# Altium PCB ESB32 with USBC PCB V1-1.PcbDoc (part 3 of 3)
Units mil, origin at the board's own origin, x right, y up, seen from the top; angles counter-clockwise.
Board outline 2700 x 1000 mil, 4 copper layers (L1, L2, L3, L4), stack 61.583 mil thick; 64 components, 73 nets, 299 pads, 161 vias.
Unrouted connection lines stored in the file: 13.
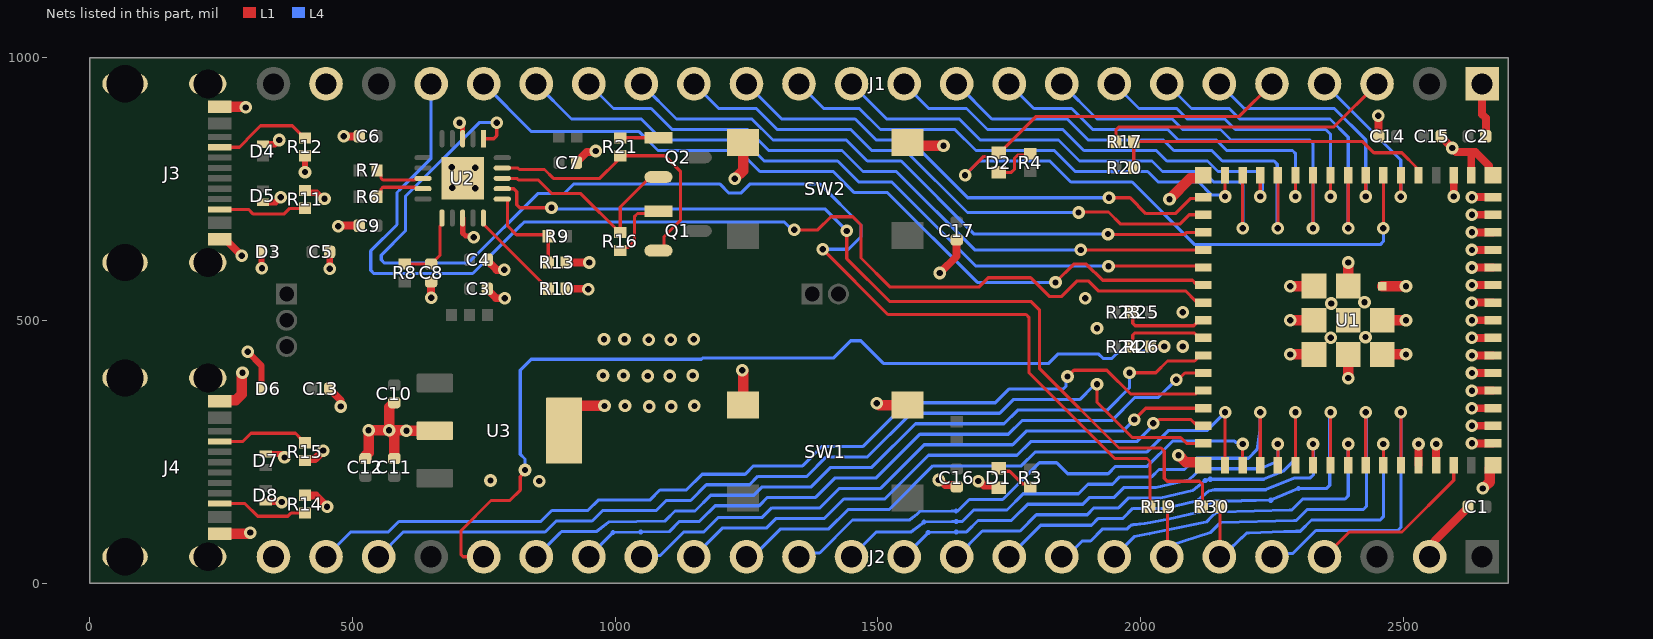
[diagram p4: the nets of this part, all layers, seen from the top]

## Via types
v1: diameter 24, hole 12, L1 to L4, tented both sides, 161 vias

## Nets (pads, with @x,y where several pads share a name; then routed paths per layer and width w, separated by ;. In a path a pad name is that pad's centre, name@x,y a point inside that pad or via, vN(x,y) a via of type N, cw(c..) or ccw(c..) an arc to the next point about the centre after c; other vN are vias at no path point) (continued)
CON_ESP_USB_P: J2.20 R26.1 | length 1785.3
  L1 w6.03: J2.20@750,50 710.55,50 707.01,53.53 707.01,100.01 764,157 799.72,157 819.58,176.85 819.58,202.48 828.56,211.47 v1(828.56,215) ; R26.1@2019.02,450 v1(2045.03,450)
  L4 w6.03: v1@828.53,215.03 828.53,236.05 819.58,245 819.58,405 840.53,425.95 1164.34,425.95 1166.4,428.01 1415.47,428.01 1448.47,461.01 1467.53,461.01 1510.58,417.97 1825.14,417.97 1843.18,436.01 1919.82,436.01 1928.69,427.14 1945.31,427.14 1961.18,443.01 1996.82,443.01 1998.36,441.47 2023.8,441.47 2029.83,447.5 2042.53,447.5 v1(2045.03,450)
CON_GPIO0: J1.3 R17.1 | length 555.5
  L1 w6: R17.1@1952.99,840 1952.99,862.14 1958.85,868 2368,868 J1.3@2450,950
DTR_FTDI: Q2.2 R16.1 U2.18 | length 412
  L1 w6: U2.18@785.41,770 813,770 816.13,766.87 854.14,766.87 880,741 934.82,741 R16.1@1008.82,667.01 ; R16.1@1010,667.01 1010,715.47 1067.12,772.6 Q2.2@1082.58,772.6
  L1 w10.01: R16.1@1008.82,667.01 R16.1@1010,667.01
ESP_USB_N: R23.2 R25.2 U1.23 | length 161.5
  L1 w6.03: R25.2@1984.97,515 1985,494.23 1989.71,489.51 2101.09,489.51 2111.57,500 U1.23@2119.45,500
ESP_USB_P: R24.2 R26.2 U1.24 | length 161.6
  L1 w6.03: R26.2@1985,450 1985,471.95 1988.53,475.49 2102.63,475.49 2111.57,466.54 U1.24@2119.45,466.54
FTDI_RESET: C8.1 R8.2 U2.11 | length 146.7
  L1 w6: R8.2@600,607.01 R8.2@600,607.01 649.96,606.97 C8.1@650,606.93 650.84,606.93 656.42,612.51 656.42,613.35 666.77,623.69 666.77,650 666.77,679.42 670.63,683.28 U2.11@670.63,694.59
FTDI_USB_N: R6.2 U2.9 | length 100.3
  L1 w6.03: R6.2@547.01,735 554.62,742.61 554.62,749.45 558.16,752.99 593.32,752.99 593.48,753.14 619.05,753.14 621.88,750.32 U2.9@634.59,750.32
FTDI_USB_P: R7.2 U2.8 | length 100.3
  L1 w6.03: R7.2@547.01,785 554.62,777.39 554.62,770.55 558.16,767.01 587.51,767.01 587.67,767.17 619.05,767.17 621.88,770 U2.8@634.59,770
GND: C1.2 C2.2 C3.2 C4.1 C5.2 C6.2 C7.2 C8.2 C9.2 C10.1 C11.2 C12.2 C13.2 C14.2 C15.2 C16.1 C17.2 D1.1 D3.1 D4.1 D5.1 D6.1 D7.1 D8.1 J1.1 J1.23 J2.2 J2.24 J3.A1B12 J3.B1A12 J3.S1 J3.S2 J3.S3 J3.S4 J4.A1B12 J4.B1A12 J4.S1 J4.S2 J4.S3 J4.S4 R10.2 R11.1 R12.1 R13.2 R14.1 R15.1 SW1.3 SW1.4 SW2.3 SW2.4 U1.1 U1.2 U1.42 U1.43 U1.46 U1.47 U1.48 U1.49 U1.50 U1.51 U1.52 U1.53 U1.54 U1.55 U1.56 U1.57 U1.58 U1.59 U1.60 U1.61 U1.62 U1.63 U1.64 U1.65 U1.66 U1.67 U1.68 U1.69 U1.70 U1.71 U1.72 U1.73 U2.3 U2.13 U2.21 U3.2 U3.4 | length 3722.3
  L1 w10.01: v1(704,876) 709.77,870.23 709.77,845.65 U2.3@710,845.41 ; U2.13@710,694.59 710,666.16 715.86,660.3 728.7,660.3 v1(731,658)
  L1 w12: v1(301,440) 327.2,413.8 D6.1@327.2,370 ; v1@327.2,599.8 D3.1@327.2,630 ; D5.1@330,724.41 354.41,724.41 v1(364,734) ; D4.1@330,834.8 352.8,834.8 v1(361,843) ; D8.1@335,154.41 365.59,154.41 v1(366,154) ; D7.1@335,245.59 364.41,245.59 v1(371,239) ; R11.1@410,747.01 414.63,742.38 432.37,742.38 443.75,731 v1(447,731) ; v1(410,782) R12.1@410,812.99 ; C5.2@456.93,630 456.93,598.07 v1(457,598)
  L1 w15: J3.B1A12@247.64,653.94 258.46,653.94 v1(289.4,623) v1@291,623 ; v1@327.2,599.8 v1(328,599) ; R15.1@410,232.99 413.13,236.12 429.12,236.12 v1(445,252) ; R14.1@410.63,166.38 430.62,166.38 v1(452,145) ; C13.2@456.93,370 456.93,368.82 478,347.75 v1(478,336) ; v1(473,679) 474,680 C9.2@513.07,680 ; v1@483,849 v1(484,850) C6.2@513.07,850 ; v1(650,543) C8.2@650,573.07 ; C3.2@756.93,560 756.93,558.82 773.75,542 v1(790,542) ; C4.1@756.93,615 756.93,613.82 774.75,596 v1(789,596) ; R10.2@907.01,560 948,560 v1(949,559) ; R13.2@907.01,610 v1(951,610) v1@952,611 ; C7.2@926.93,800 926.93,801.18 946.03,820.28 961.28,820.28 v1(963,822) ; SW2.3@1556.5,838.58 SW2.3@1563.08,832 ; v1(1616,196) 1618.44,196 1628.23,186.2 1646.87,186.2 C16.1@1650,183.07 ; v1(1618,590) 1650,622 C17.2@1650,653.07 ; v1(1691,194) 1693.44,194 1701.83,185.61 1725.69,185.61 D1.1@1730,181.3 ; v1(2452.54,889) 2452.54,850.54 C14.2@2453.07,850 ; U1.42@2528.9,224.41 v1(2528.9,264.57) ; J2.2@2550,50 2559.38,59.38 2559.38,80.12 2623.07,143.82 C1.2@2623.07,145 ; U1.43@2562.36,224.41 v1(2562.36,264.57) ; C15.2@2571.93,850 2571.93,848.82 v1(2593,827.75) 2593,827 2600,820 2637,820 ; v1(2595.83,735.43) U1.2@2595.83,775.59 ; U1.1@2629.29,775.59 2629.29,812.29 2637,820 ; v1(2630.47,265.75) U1.46@2670.63,265.75 ; v1(2630.47,299.21) U1.47@2670.63,299.21 ; v1(2630.47,332.68) U1.48@2670.63,332.68 ; v1(2630.47,366.14) U1.49@2670.63,366.14 ; v1(2630.47,399.61) U1.50@2670.63,399.61 ; v1(2630.47,433.07) U1.51@2670.63,433.07 ; v1(2630.47,466.54) U1.52@2670.63,466.54 ; v1(2630.47,500) U1.53@2670.63,500 ; v1(2630.47,533.46) U1.54@2670.63,533.46 ; v1(2630.47,566.93) U1.55@2670.63,566.93 ; v1(2630.47,600.39) U1.56@2670.63,600.39 ; v1(2630.47,633.86) U1.57@2670.63,633.86 ; v1(2630.47,667.32) U1.58@2670.63,667.32 ; v1(2630.47,700.79) U1.59@2670.63,700.79 ; v1(2630.47,734.25) U1.60@2670.63,734.25 ; J1.1@2650,950 2650,891.81 2656.93,884.88 C2.2@2656.93,850 ; U1.62@2670.63,775.59 2663,783.22 2663,794 2637,820
  L1 w20: J4.B1A12@247.64,94.09 304.09,94.09 v1(306,96) ; J4.A1B12@247.64,346.06 249.45,347.87 278.28,347.87 290,359.59 290,399 v1(291,400) ; J3.A1B12@247.64,905.91 296.09,905.91 v1(297,905) ; R14.1@410,167.01 R14.1@410.63,166.38 ; C12.2@525,236.93 526.18,236.93 526.81,237.56 526.81,243.74 531,247.93 v1@531,289.92 ; v1(531,291) v1(570,291) ; C11.2@580,236.93 580,279.92 570,289.92 v1(570,291) ; C10.1@580,343.07 578.82,343.07 570,334.25 v1(570,291) ; U3.2@656.97,290 v1(603,290) 602.5,290.5 570.5,290.5 v1(570,291) ; U3.4@903.03,290 903.03,312.55 927.48,337 v1(980,337) ; v1(1228,769) 1243.5,784.5 SW2.4@1243.5,838.58 ; v1(1242,405) 1243.5,403.5 SW1.4@1243.5,338.58 ; v1(1498,342) 1499.08,342 1502.5,338.58 SW1.3@1556.5,338.58 ; SW2.3@1563.08,832 v1(1625,832) ; v1(2055,730) 2094.84,769.84 2113.7,769.84 U1.63@2119.45,775.59 ; v1(2072,243) 2073.08,243 2085.92,230.16 2113.7,230.16 U1.64@2119.45,224.41 ; v1(2285,565) 2330.04,565 U1.71@2330.08,564.96 ; v1(2285.04,435.04) U1.73@2330.08,435.04 ; v1(2285.04,500) U1.72@2330.08,500 ; v1(2395.04,390) U1.70@2395.04,435.04 ; U1.69@2395.04,564.96 v1(2395.04,610) ; U1.68@2460,435.04 v1(2505.04,435.04) ; U1.67@2460,500 v1(2505.04,500) ; U1.66@2460,564.96 v1(2505.04,564.96) ; v1(2651,180) 2654,183 2655,183 2664.88,192.88 2664.88,218.66 U1.65@2670.63,224.41
  other v1: 856,194 763,195 1065,336 1107,336 1019,337 1151,337 1062,394 1104,394 977,395 1016,395 1148,395 2080,450 1064,463 1106,463 979,464 1018,464 1150,464 2362,467 2428,468 1917,485 2080,515 2363,532 2426,534 1895,542 734,751 690,752 734,790 689,791
GPIO0: R17.2 R20.2 U1.4 | length 625.2
  L1 w6: R20.2@1987.01,790 R17.2@1987.01,840 2422.72,840 2443.94,818.78 2497.08,818.78 2526.02,789.84 2526.02,778.46 U1.4@2528.9,775.59
GPIO1: J1.4 U1.5 | length 315.8
  L1 w6: v1(2495,735) 2495,775.16 U1.5@2495.43,775.59
  L4 w6: J1.4@2350,950 2495,805 v1(2495,735)
GPIO2: D2.1 J1.5 U1.6 | length 1657.2
  L1 w6: v1(1666,776) 1701.89,811.89 1723.19,811.89 D2.1@1730,818.7 1731.97,818.7 1801.27,888 2188,888 J1.5@2250,950 ; v1(2461.97,675.04) U1.6@2461.97,775.59
  L4 w6: v1(1666,776) 1693,803 1827.29,803 1867.29,763 1983.82,763 2102.82,644 2456.11,644 2461.97,649.86 v1(2461.97,675.04)
GPIO3: J1.6 U1.7 | length 470.7
  L1 w6: v1(2428.5,735.43) U1.7@2428.5,775.59
  L4 w6: J1.6@2150,950 2197,903 2368.72,903 2428.5,843.21 v1(2428.5,735.43)
GPIO4: J1.7 U1.8 | length 661
  L1 w6: v1(2395.04,675.04) U1.8@2395.04,775.59
  L4 w6: J1.7@2050,950 2097,903 2168.72,903 2188.72,883 2360.43,883 2395.04,848.39 v1(2395.04,675.04)
GPIO5: J1.8 U1.9 | length 609.8
  L1 w6: v1(2361.57,735.43) U1.9@2361.57,775.59
  L4 w6: J1.8@1950,950 1997,903 2068.72,903 2088.72,883 2160.43,883 2180.43,863 2352.15,863 2361.57,853.57 v1(2361.57,735.43)
GPIO6: J1.9 U1.10 | length 787.5
  L1 w6: v1(2328.11,675.04) U1.10@2328.11,775.59
  L4 w6: J1.9@1850,950 1917,883 2060,883 2080,863 2152.15,863 2172.15,843 2322.25,843 2328.11,837.14 v1(2328.11,675.04)
GPIO7: J1.10 U1.11 | length 722
  L1 w6: v1(2294.65,735.43) U1.11@2294.65,775.59
  L4 w6: J1.10@1750,950 1797,903 1868.72,903 1908.72,863 2051.72,863 2071.72,843 2143.86,843 2163.86,823 2289.14,823 2295,817.14 2295,735.79 v1(2294.65,735.43)
GPIO8: J1.11 U1.12 | length 896.5
  L1 w6: v1(2261.18,675.04) U1.12@2261.18,775.59
  L4 w6: J1.11@1650,950 1717,883 1860.43,883 1900.43,843 2043.43,843 2063.43,823 2135.58,823 2155.58,803 2254.14,803 2260,797.14 2260,676.22 v1(2261.18,675.04)
GPIO9: J1.12 U1.13 | length 837.2
  L1 w6: v1(2227.72,735.43) U1.13@2227.72,775.59
  L4 w6: J1.12@1550,950 1597,903 1668.72,903 1708.72,863 1852.15,863 1892.15,823 2030,823 2050,803 2127.29,803 2147.29,783 2226.14,783 2232,777.14 2232,748.29 2230.4,746.69 2230.4,738.11 v1(2227.72,735.43)
GPIO10: J1.13 U1.14 | length 1007.8
  L1 w6: v1(2194.25,675.04) U1.14@2194.25,775.59
  L4 w6: J1.13@1450,950 1517,883 1655,883 1695,843 1843.86,843 1883.86,803 2021.72,803 2041.72,783 2119.01,783 2139.01,763 2189.14,763 2195,757.14 2195,675.79 v1(2194.25,675.04)
GPIO11: J1.14 U1.15 | length 939.8
  L1 w6: v1(2160.79,735.43) U1.15@2160.79,775.59
  L4 w6: J1.14@1350,950 1397,903 1465,903 1505,863 1646.72,863 1686.72,823 1835.58,823 1875.58,783 2013.43,783 2033.43,763 2110.73,763 2135.61,738.11 2158.11,738.11 v1(2160.79,735.43)
GPIO12: J1.15 U1.16 | length 986.1
  L1 w6: v1(1940,733) 1980,733 2010,703 2066.18,703 2094.56,731.38 2116.57,731.38 U1.16@2119.45,734.25
  L4 w6: J1.15@1250,950 1317,883 1456.72,883 1496.72,843 1563.14,843 1569,837.14 1569,834.82 1670.82,733 v1(1940,733)
GPIO13: J1.16 U1.17 | length 1088.2
  L1 w6: v1(1882,705) 1883,706 1939,706 1962,683 2074.47,683 2092.26,700.79 U1.17@2119.45,700.79
  L4 w6: J1.16@1150,950 1197,903 1268.72,903 1308.72,863 1448.43,863 1488.43,823 1552.53,823 1670.53,705 v1(1882,705)
GPIO14: J1.17 U1.18 | length 1190.1
  L1 w6: v1(1938,664) 1939,663 2082.75,663 2087.07,667.32 U1.18@2119.45,667.32
  L4 w6: J1.17@1050,950 1117,883 1260.43,883 1300.43,843 1440.15,843 1480.15,803 1544.25,803 1683.25,664 v1(1938,664)
GPIO15: J1.18 U1.19 | length 1300.4
  L1 w6: v1(1885.86,633.86) U1.19@2119.45,633.86
  L4 w6: J1.18@950,950 997,903 1068.72,903 1108.72,863 1252.15,863 1292.15,823 1431.86,823 1471.86,783 1535,783 1684.14,633.86 v1(1885.86,633.86)
GPIO16: J1.19 U1.20 | length 1414.3
  L1 w6: v1(1939,603) 2116.84,603 U1.20@2119.45,600.39
  L4 w6: J1.19@850,950 917,883 1050,883 1090,843 1243.86,843 1283.86,803 1423.58,803 1463.58,763 1526.72,763 1686.72,603 v1(1939,603)
GPIO17: J1.20 U1.21 | length 1557
  L1 w6: v1(1838,572) 1872.86,606.86 1896.96,606.86 1927.82,576 2098.84,576 2105.04,569.8 2116.57,569.8 U1.21@2119.45,566.93
  L4 w6: J1.20@750,950 841,859 1045.72,859 1081.72,823 1235.58,823 1275.58,783 1415.29,783 1455.29,743 1518.43,743 1689.43,572 v1(1838,572)
GPIO18: J1.21 U1.22 | length 2191
  L1 w6: v1(1341,672) 1385.99,672 1410.99,697 1452.18,697 1468,681.18 1468,618.57 1523.57,563 1692,563 1710,581 1790.82,581 1826.82,545 1849.18,545 1879.18,575 1900.53,575 1919.53,556 2085.54,556 2105.2,536.34 2116.57,536.34 U1.22@2119.45,533.46
  L4 w6: J1.21@650,950 650,808.19 592,750.19 585,743.19 585,682.11 535,632.11 535,594.86 540.86,589 729,589 790,650 818,678 827,687 1322.21,687 1337.21,672 v1(1341,672)
GPIO21: J2.19 U1.25 | length 1444
  L1 w6: v1(1979,400) 2028.82,400 2051.3,422.48 2102.84,422.48 2108.7,428.34 2108.7,430.2 2111.57,433.07 U1.25@2119.45,433.07
  L4 w6: J2.19@850,50 895.07,95.07 898,98 964.52,98 987.72,116 1094.75,117.78 1097.6,120.64 1113.96,137 1152.15,137 1182.15,167 1264,167 1280,183 1373.43,183 1410.43,220 1488.68,220 1571.68,303 1740.01,303 1766.01,329 1936.72,329 1979,371.28 v1(1979,400)
GPIO26: J2.18 U1.26 | length 1313.5
  L1 w6: v1(2068,387) 2071.79,387 2084.39,399.61 U1.26@2119.45,399.61
  L4 w6: J2.18@950,50 993.07,93.07 996,96 ; 996.03,96 1049,96.99 ; 1049.19,96.99 1103.17,97.93 1122.25,117 1160.43,117 1163.36,119.93 1190.43,147 1274.15,147 1290.15,163 1381.72,163 1418.72,200 1496.96,200 1579.96,283 1748.29,283 1774.29,309 1945,309 1988.96,352.96 2033.96,352.96 v1(2068,387)
  L4 w10: 1049,96.99 cw(c1050,50) 1049.19,96.99
GPIO33: J2.17 U1.28 | length 1186.5
  L1 w6: v1(1988,311) 2009.68,332.68 U1.28@2119.45,332.68
  L4 w6: J2.17@1050,50 1052.47,52.47 1086,52.47 1130.53,97 1168.72,97 1196.72,125 1280.43,125 1298.43,143 1390,143 1427,180 1505.25,180 1588.25,263 1756.58,263 1782.58,289 1966,289 v1(1988,311)
GPIO34: J2.16 U1.29 | length 1084.7
  L1 w6: v1(2024,304) 2027.79,304 2034.79,311 2095.84,311 2104.76,302.09 2116.57,302.09 U1.29@2119.45,299.21
  L4 w6: J2.16@1150,50 1205,105 1288.72,105 1306.72,123 1398.43,123 1435.43,160 1513.53,160 1596.53,243 1764.86,243 1790.86,269 1992.79,269 2024,300.21 v1(2024,304)
GPIO35: J2.15 U1.31 | length 1125.2
  L1 w6: U1.31@2160.79,224.41 v1(2160.79,324.96)
  L4 w6: J2.15@1250,50 1262,50 1315,103 1406.72,103 1443.72,140 1521.82,140 1604.82,223 1773.15,223 1799.15,249 2011.53,249 2052.53,290 2125.83,290 v1(2160.79,324.96)
GPIO36: J2.14 U1.32 | length 994
  L1 w6: U1.32@2194.25,224.41 v1(2194.25,264.57)
  L4 w6: J2.14@1350,50 1357.23,57.23 1389.23,57.23 1449.07,117.07 1452,120 1560.23,120 1574.47,131.04 1579.43,136 1640.6,136.87 1648.63,136.99 ; 1648.8,136.99 1652.19,137.04 1674.15,159 1737.43,159 1807.43,229 1840.18,229 1861.18,208 1938.29,208 1952.29,222 2012.82,222 2060.82,270 2108.9,270 2178.92,270 2181.67,267.25 2191.57,267.25 v1(2194.25,264.57)
  L4 w10: 1648.63,136.99 cw(c1650,50) 1648.8,136.99
GPIO37: J2.13 U1.33 | length 1026
  L1 w6: U1.33@2227.72,224.41 v1(2227.72,324.96)
  L4 w6: J2.13@1450,50 1494.21,94.21 1497.14,97.14 1563.38,97.14 1587.72,116 ; 1587.75,116 1640.9,116.87 1648.95,116.99 ; 1649.01,116.99 1660.6,117.16 1682.43,139 1745.72,139 1776.72,170 1881.86,170 1899.86,188 1946.58,188 1960.58,202 2021.1,202 2035.1,216 2079.73,216 2083.64,216 2106.52,237.57 2205.44,237.57 2221.25,253.38 2227.72,291.08 v1(2227.72,324.96)
  L4 w10: 1648.95,116.99 cw(c1650,50) 1649.01,116.99
GPIO38: J2.12 U1.34 | length 849.8
  L1 w6: U1.34@2261.18,224.41 v1(2261.18,264.57)
  L4 w6: J2.12@1550,50 1593.07,93.07 1596,96 ; 1596.03,96 1649,96.99 ; 1649.3,96.99 1669,97.29 1690.72,119 1754,119 1756.93,121.93 1785,150 1890.15,150 1903.15,163 1949.86,163 1968.86,182 2029.38,182 2091.47,196 2114.8,217.57 2118.49,217.57 2228.32,217.57 2255.32,229.2 2261.18,235.06 v1(2261.18,264.57)
  L4 w10: 1649,96.99 cw(c1650,50) 1649.3,96.99
GPIO39: J2.11 U1.35 | length 902
  L1 w6: U1.35@2294.65,224.41 v1(2294.65,324.96)
  L4 w6: J2.11@1650,50 1699,99 1770.72,99 1801.72,130 1898.43,130 1911.43,143 1958.15,143 1977.15,162 2037.67,162 2098.75,175.77 2110.53,185.33 2118.6,192.03 2122.88,195.25 2132.64,197.56 2234.33,197.57 2272.49,213.49 2294.65,235.65 v1(2294.65,324.96)
GPIO40: J2.10 U1.36 | length 732
  L1 w6: U1.36@2328.11,224.41 v1(2328.11,264.57)
  L4 w6: J2.10@1750,50 1810,110 1906.72,110 1919.72,123 1966.43,123 1985.43,142 2045.95,142 2105.84,155.77 2108.79,157.54 2130.1,175.25 2140.95,177.57 2237.47,177.57 2238.4,177.6 2292.09,200 2323.14,200 2329,205.86 2329,263.68 v1(2328.11,264.57)
GPIO41: J2.9 U1.37 | length 792.2
  L1 w6: U1.37@2361.57,224.41 v1(2361.57,324.96)
  L4 w6: J2.9@1850,50 1858.86,50 1888.86,80 1905,80 1928,103 1974.72,103 1979.67,107.96 1982.19,110.48 1985.74,110.84 2007.95,113.08 2054.24,122 2116.32,136 2121.56,141.24 2137.14,154.24 2138.57,155.43 2139.05,155.6 2192.21,156.67 2247.67,157.74 ; 2247.71,157.76 2300.36,179.99 ; 2300.4,180 2336.37,180 2354.14,180 2360,185.86 2360,323.39 v1(2361.57,324.96)
GPIO42: J2.8 U1.38 | length 621
  L1 w6: U1.38@2395.04,224.41 v1(2395.04,264.57)
  L4 w6: J2.8@1950,50 1988.78,88.78 2017.05,93.9 2064.04,103.52 2124.61,116 2135.07,126.46 2143.49,133.49 2147.18,134.61 2148.52,134.86 2283.6,138.78 2287.57,138.89 2290.38,141.7 2308.68,160 2389.18,160 2395.04,165.86 v1(2395.04,264.57)
GPIO45: J2.5 U1.41 | length 588.2
  L1 w6: U1.41@2495.43,224.41 v1(2495.43,324.96)
  L4 w6: J2.5@2250,50 2256.47,56.47 2290,56.47 2333.53,100 2489.58,100 2495.43,105.86 v1(2495.43,324.96)
GPIO46: J2.4 U1.44 | length 335
  L1 w6: J2.4@2350,50 2397,97 2497.38,97 2595.83,195.44 U1.44@2595.83,224.41
GPIO47: J2.23 U1.27 | length 1846.7
  L1 w6: v1(1861,393) 1873,405 1935.82,405 1980.82,360 2105.43,360 2111.57,366.14 U1.27@2119.45,366.14
  L4 w6: J2.23@450,50 497,97 568.72,97 588.72,117 858.72,117 879.72,138 947.96,138 967.74,157.78 1066,157.78 1085.22,177 1135.58,177 1165.58,207 1247.43,207 1263.43,223 1356.86,223 1393.86,260 1472.11,260 1555.11,343 1723.44,343 1749.44,369 1852.46,369 1858.32,374.86 1858.32,390.32 v1(1861,393)
GPIO48: J2.22 U1.30 | length 1771.8
  L1 w6: v1(1917,378) 1917,343.82 1983.82,277 2076.18,277 2087.44,265.75 U1.30@2119.45,265.75
  L4 w6: J2.22@550,50 597,97 867,97 888,118 956.24,118 976.02,137.78 1078,137.78 1097.22,157 1143.86,157 1173.86,187 1255.72,187 1271.72,203 1365.15,203 1402.15,240 1480.4,240 1563.4,323 1731.73,323 1757.73,349 1884,349 1910.32,375.32 1914.32,375.32 v1(1917,378)
NetD1_2: D1.2 R3.1 | length 74.8
  L1 w6: D1.2@1730,218.7 1736.08,212.63 1750.73,212.63 1774.73,188.62 1784.37,188.62 R3.1@1790,182.99
NetD2_2: D2.2 R4.1 | length 87.2
  L1 w6: D2.2@1730,781.3 1754.14,781.3 1760,787.16 1760,808.28 1765.86,814.14 1787.13,814.14 R4.1@1790,817.01
NetJ3_A5: J3.A5 R12.2 | length 189.3
  L1 w6: J3.A5@247.64,829.13 285.28,829.13 298.63,842.48 298.63,843.34 325.29,870 385.83,870 408.82,847.01 R12.2@410,847.01
NetJ3_B5: J3.B5 R11.2 | length 170.2
  L1 w6: J3.B5@247.64,711.02 302.4,711.02 310.9,702.52 370.7,702.52 381.18,712.99 R11.2@410,712.99
NetJ4_A5: J4.A5 R15.2 | length 177
  L1 w6: J4.A5@247.64,269.29 291.44,269.29 307.15,285 320,285 392.01,285 403.19,273.82 403.19,272.64 408.82,267.01 R15.2@410,267.01
NetJ4_B5: J4.B5 R14.2 | length 174.9
  L1 w6: J4.B5@247.64,151.18 295.82,151.18 320,127 377.18,127 383.18,132.99 R14.2@410,132.99
NetQ1_1: Q1.1 R16.2 | length 131
  L1 w6: R16.2@1010,632.99 1015.63,638.62 1025.27,638.62 1036.81,650.16 1036.81,697.28 1042.67,703.14 1078.32,703.14 Q1.1@1082.58,707.4
NetQ2_1: Q2.1 R21.2 | length 72.7
  L1 w6: R21.2@1010,847.01 1010.2,847.2 1082.38,847.2 Q2.1@1082.58,847.4
NetR10_1: R10.1 U2.15 | length 186.7
  L1 w6: U2.15@749.37,694.59 749.37,683.28 865.84,566.81 867.36,566.81 872.99,561.18 R10.1@872.99,560
RTS_FTDI: Q1.2 R21.1 U2.19 | length 551.2
  L1 w6: U2.19@785.41,789.68 815.19,789.68 818,786.87 865.85,786.87 882.72,770 971.18,770 1003.19,802.01 1003.19,807.36 1008.82,812.99 R21.1@1010,812.99 1094.78,812.99 1124.29,783.48 1124.29,689.93 1093.23,658.86 1093.23,638.38 1087.44,632.6 Q1.2@1082.58,632.6
RXD_FTDI: R19.2 U2.1 | length 2492
  L1 w6: U2.1@749.37,845.41 769.14,845.41 775,851.27 v1(775,876) ; v1(1395,635) 1519.12,510.88 1782.12,510.88 1787.98,505.02 1787.98,399.55 1950.53,237 2012.13,237 2017.99,231.14 R19.2@2017.99,145
  L4 w6: v1(775,876) 741.47,876 601,735.53 601,669.82 555,623.82 555,614.86 560.86,609 720.72,609 852.72,741 902.82,741 920.82,759 1199.82,759 1216.82,742 1239.18,742 1256.18,759 1390.18,759 1468,681.18 1468,658.82 1444.18,635 v1(1395,635)
TXD_FTDI: R30.2 U2.17 | length 1749.1
  L1 w6: U2.17@785.41,750.32 807.14,750.32 813,744.46 813,719.86 818,714.86 818.86,714 v1(879,714) ; v1(1441,670) 1441,617.28 1522.28,536 1791.14,536 1807.98,519.16 1807.98,407.84 1958.82,257 2039.14,257 2045,251.14 2045,199.52 2050.86,193.66 2112.13,193.66 2117.99,187.8 R30.2@2117.99,145
  L4 w6: v1(879,714) 881,712 1399,712 v1(1441,670)
U0RXD: J2.6 R30.1 U1.40 | length 616
  L1 w6: J2.6@2150,50 2151,51 2151,144 R30.1@2152.01,145 ; U1.40@2461.97,224.41 v1(2461.97,264.57)
  L4 w6: J2.6@2150,50 2154.2,50 2202.36,95.35 2206.12,95.48 2273.02,97.84 2295.79,98.64 2296.14,98.65 2303.9,98.65 2325.25,120 2456.11,120 2461.97,125.86 v1(2461.97,264.57)
U0TXD: J2.7 R19.1 U1.39 | length 796.8
  L1 w6: J2.7@2050,50 2051,51 2051,144 R19.1@2052.01,145 ; U1.39@2428.5,224.41 v1(2428.5,324.96)
  L4 w6: J2.7@2050,50 2050,65.68 2055.54,71.22 2056.09,71.54 2132.89,96 2148.57,111.68 2152.51,114.97 2292.12,119.01 2296.09,119.13 2298.9,121.94 2316.96,140 2424.14,140 2427.07,142.93 2430,145.86 2430,323.46 v1(2428.5,324.96)
VBUS_SENSE: R9.2 R13.1 U2.16 | length 197.8
  L1 w6: U2.16@785.41,730.63 795.21,730.63 795.43,730.4 795.43,679.57 812.18,662.82 870.17,662.82 R9.2@872.99,660 ; R13.1@872.99,610 R9.2@872.99,661.18
pads on no net: J1.24 J3.A8 J3.B8 J4.A8 J4.B8 U2.2 U2.4 U2.5 U2.6 U2.7 U2.14

## Polygon pours and split planes (outlines as drawn)
GND on L1 "GND_L01_P010" (solid, pour order 10): 510,356 513,225 602,225 602,269 853,269 860,262 860,220 940,220 1171,220 1171,322 1171,490 974,490 914,414 901,391 706,391 704,389 705,388 705,344 607,344 605,346 605,361 513,361 508,356
GND on L1 "GND_L01_P008" (solid, pour order 8): 2268,626 2520,626 2521,627 2521,368 2275,368 2268,368
+5VBUS_2 on L1 "+5VBUS_2_L01_P007" (solid, pour order 7): 344,470 436,470 436,303 344,303
+5VBUS_1 on L1 "+5VBUS_1_L01_P006" (solid, pour order 6): 346,614 364,614 364,575 364,573 355,573 355,530 402,530 402,613 405,616 434,616 434,651 346,651
+5V on L1 "+5V_L01_P004" (solid, pour order 4): 687,405 696,396 696,361 690,355 619,355 619,365 565,365 565,378 454,489 396,489 383.62,480 362,480 350,492 351,511 356,520 387.86,520 397,512 469,512 576,405
+3V3_REG on L1 "+3V3_REG_L01_P003" (solid, pour order 3): 509,218 509,150 695,150 695,218
+3V3_FTDI on L1 "+3V3_FTDI_L01_P002" (solid, pour order 2): 617,560.33 569.98,561.64 566,566 535,600 535,603 535,695 545,695 591,741 609,741 609,724 648,685 648,673 626,651 577,651 577,586 617,586
+3V3_FTDI on L1 "+3V3_FTDI_L01_P001" (solid, pour order 1): 904.94,865.02 905,864.96 905,785 888,785 875,798 875,820 800,820 800,865.02
+3V3 on L1 "+3V3_L01_P000" (solid, pour order 0): 2474,895 2474,837 2553,836 2553,837 2553,895
GND on L2 "GND_L02_P013" (solid, pour order 13): 13,990 2687,990 2696,981 2696,7 13,7 13,10 13,17
+3V3_REG on L2 "+3V3_REG_L02_P012" (solid, pour order 12): 509,217 509,145 515,145 693,145 693,213 689,217 511,217
+3V3 on L2 "+3V3_L02_P011" (solid, pour order 11): 2685,12 2691,18 2691,986 913,986 913,837 1020,837 1163,694 1203,694 1203,622 1207,618 1399,618 1399,524 1409,514 1543,514 1543,700 1542,701 1543,702 1827,702 1827,713 1891,777 2478,777 2562,677.66 2560,659 2560,332 2562,330 2518,330 2518,234 2521,231 2387,97 2313,97 2313,14 2692,14
GND on L3 (split plane): 2699.95,0.05 0.05,0.05 0.05,999.95 2699.95,999.95

## Silkscreen, mask and mechanical layers (free items; w line width, h text height)
Top Overlay:
  text "J1" at 2346,826 h40
  text "USER" at 1710,688 h40
  text "3V3" at 1492,529 h40
  text "REG" at 1208,528 h40
  text "USB1" at 434,527 h40
  text "UART" at 26,526 h40
  text "+5V" at 435,470 h40
  text "ESP" at 26,446 h40
  text "USB2" at 437,413 h40
  text "RESET" at 1321,405 h40
  text "POWER" at 1707.19,290.78 h40
  text "J2" at 2346,106 h40
Bottom Overlay:
  text "NC" at 376,879 h40 r90
  text "GND" at 476,879 h40 r90
  text "5V" at 576,879 h40 r90
  text "I018" at 676,879 h40 r90
  text "I017" at 776,879 h40 r90
  text "I016" at 876,879 h40 r90
  text "I015" at 976,879 h40 r90
  text "I014" at 1076,879 h40 r90
  text "I013" at 1176,879 h40 r90
  text "I012" at 1276,879 h40 r90
  text "I011" at 1376,879 h40 r90
  text "I010" at 1476,879 h40 r90
  text "I09" at 1576,879 h40 r90
  text "I08" at 1676,879 h40 r90
  text "I07" at 1776,879 h40 r90
  text "I06" at 1876,879 h40 r90
  text "I05" at 1976,879 h40 r90
  text "I04" at 2076,879 h40 r90
  text "I03" at 2176,879 h40 r90
  text "I02" at 2276,879 h40 r90
  text "I01" at 2376,879 h40 r90
  text "I00" at 2476,879 h40 r90
  text "3V3" at 2576,879 h40 r90
  text "GND" at 2676,879 h40 r90
  text "YASIN ERDEM" at 1564,478 h40
  text "USB+" at 766,266 h40 r90
  text "USB-" at 666,265 h40 r90
  text "GND" at 366,262 h40 r90
  text "I047" at 466,262 h40 r90
  text "I048" at 566,262 h40 r90
  text "I021" at 866,262 h40 r90
  text "I026" at 966,262 h40 r90
  text "I033" at 1066,262 h40 r90
  text "I034" at 1166,262 h40 r90
  text "I035" at 1266,262 h40 r90
  text "I036" at 1366,262 h40 r90
  text "I037" at 1466,262 h40 r90
  text "I038" at 1566,262 h40 r90
  text "I039" at 1666,262 h40 r90
  text "I040" at 1766,262 h40 r90
  text "I041" at 1866,262 h40 r90
  text "I042" at 1966,262 h40 r90
  text "TXD" at 2066,262 h40 r90
  text "RXD" at 2166,262 h40 r90
  text "I045" at 2266,262 h40 r90
  text "I046" at 2366,262 h40 r90
  text "EN" at 2466,262 h40 r90
  text "GND" at 2566,262 h40 r90
  text "3V3" at 2666,262 h40 r90
Board Shape:
  the board outline again, w20

## Text inside footprints (layer, text, board x,y; h text height)
J1: Bottom Overlay "1" at 2623,1024 h40 r270
J2: Bottom Overlay "1" at 2621,-32 h40 r270
J6: Top Overlay "1" at 301,526 h40